# Altium PCB CablineDP.PcbDoc
Units mil, origin at the board's own origin, x right, y up, seen from the top; angles counter-clockwise.
Board outline 975 x 1750 mil, 2 copper layers (Top Layer, Bottom Layer); 11 components, 20 nets, 110 pads, 7 vias.
Unrouted connection lines stored in the file: 9.
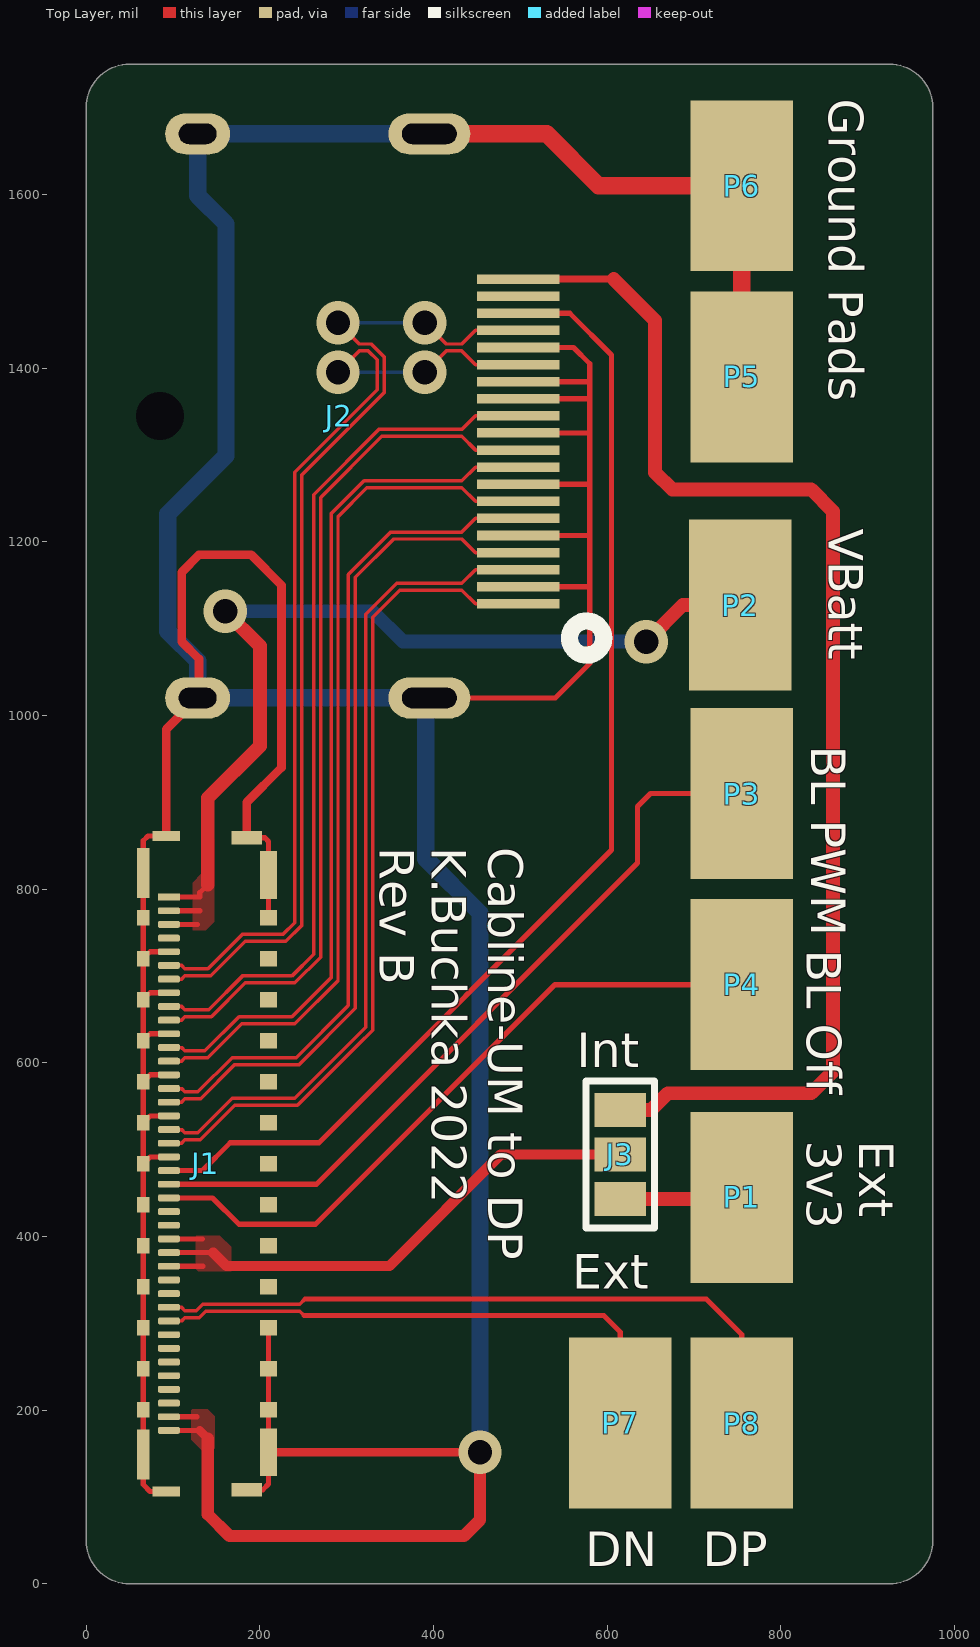
[diagram p0: Top Layer view]
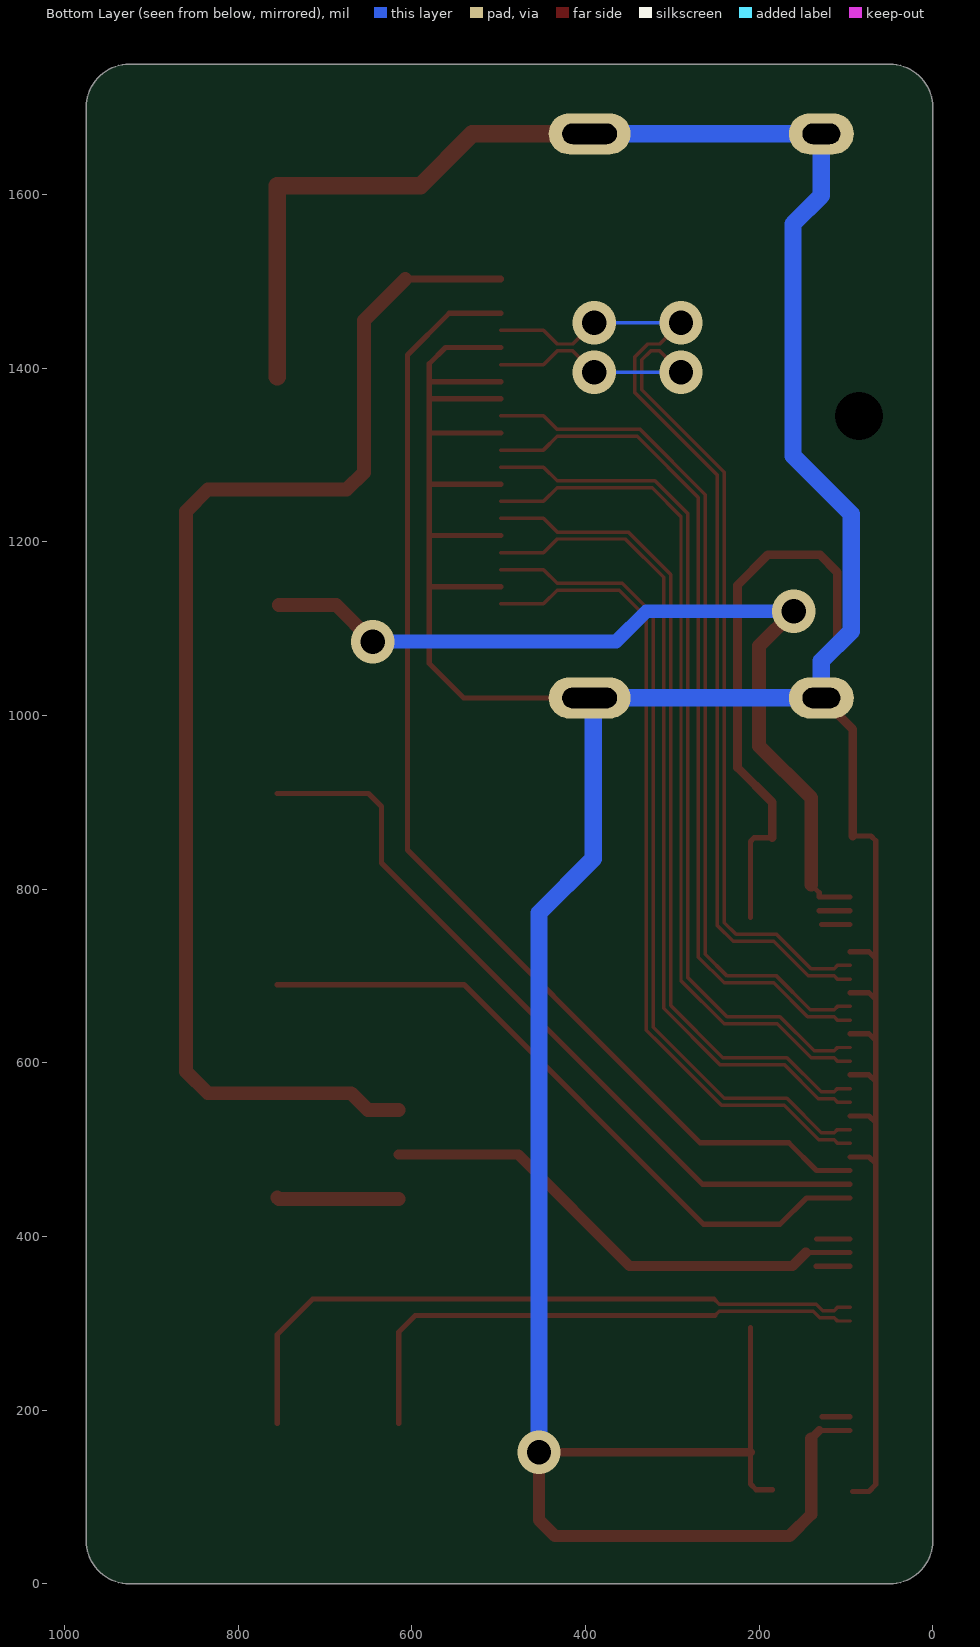
[diagram p1: Bottom Layer view, seen from below]

## Layer stack, top to bottom
Top Solder: solder mask 0.4, Solder Resist, Dk 3.5
Top Layer: signal copper 1.4
Dielectric 1: dielectric 12.6, FR-4, Dk 4.8
Bottom Layer: signal copper 1.4
Bottom Solder: solder mask 0.4, Solder Resist, Dk 3.5

## Board outline
0,50 0,1700 cw(c50,1700) 50,1750 925,1750 cw(c925,1700) 975,1700 975,50 cw(c925,50) 925,0 50,0 cw(c50,50)

## Design rules (kind name [scope] priority, off if disabled: settings)
Clearance [All] p1: gap=7 ignorepadtopadclearanceinfootprint=FALSE except(0: Arc-Hole Track-Hole SMDPad-Hole THPad-Hole Via-Hole Fill-Hole Poly-Hole Region-Hole Text-Hole; 4: Arc-Arc Arc-Track Track-Track)
DiffPairsRouting [All] p1: maxlimit=10 minlimit=4 mostfreqgap=4 toplayer_minwidth=4 toplayer_maxwidth=4 toplayer_prefwidth=4 bottomlayer_minwidth=4 bottomlayer_maxwidth=4 bottomlayer_prefwidth=4 maxuncoupledlength=500
PolygonConnect [All] p1: connectstyle=Relief reliefconductorwidth=10 reliefentries=4 polygonreliefangle="90 Angle" airgapwidth=10
RoomDefinition CablineDP [InComponentClass('CablineDP')] p1: confinementstyle=ConfineIn formatcopy=TRUE lockcomponents=FALSE outline -590,-55 6560,-55 6560,4825 -590,4825
RoutingVias [All] p1: holewidth=28 width=50 viastyle="Through Hole" minholewidth=28 minwidth=50 maxholewidth=28 maxwidth=50
SolderMaskExpansion [All] p1: expansion=4
Width [All] p1: maxlimit=20 minlimit=4 preferedwidth=10 minimp=50.000000 maximp=50.000000 favimp=50.000000
29 further rules are at their usual default settings.

## Classes and differential pairs
net class EDP_LINES: EDP_AUX_N EDP_AUX_P EDP_TX0_N EDP_TX0_P EDP_TX1_N EDP_TX1_P EDP_TX2_N EDP_TX2_P EDP_TX3_N EDP_TX3_P
component class CablineDP: J1 J3 P1 P2 P3 P4 P5 P6 P7 P8
differential pair EDP_TX3: +EDP_TX3_P -EDP_TX3_N
differential pair EDP_TX2: +EDP_TX2_P -EDP_TX2_N
differential pair EDP_TX1: +EDP_TX1_P -EDP_TX1_N
differential pair EDP_TX0: +EDP_TX0_P -EDP_TX0_N
differential pair EDP_AUX: +EDP_AUX_P -EDP_AUX_N

## Components (designator, comment, footprint, x,y, rotation, side; value= is the part's Value field where it differs from the comment)
J1 "I-PEX_20879-040E-01" I-PEX_20879-040E-01 95.24,483.78 r90 top
J2 "47272-0029" 47272-0029 497.6,1345 r270 top
J3 "Jumper SMD 3" "Jumper SMD 3" 615,520 r270 top
P1 "SMD 3x5" "SMD 3x5" 755,445 r270 top
P2 "SMD 3x5" "SMD 3x5" 753,1127 r270 top
P3 "SMD 3x5" "SMD 3x5" 755,910 r270 top
P4 "SMD 3x5" "SMD 3x5" 755,690 r270 top
P5 "SMD 3x5" "SMD 3x5" 755,1390 r270 top
P6 "SMD 3x5" "SMD 3x5" 755,1610 r270 top
P7 "SMD 3x5" "SMD 3x5" 615,185 r270 top
P8 "SMD 3x5" "SMD 3x5" 755,185 r270 top

## Footprints (in the part's own frame and the unit in brackets; to place one, negate y for a bottom-side part, rotate by r counter-clockwise, add the part's x,y. Pads: shape width x height; smd on the part's side, far side on the other; paste and mask are expansions set on the pad)
47272-0029 [mm] "Molex Displayport"
  rect 0.28x2.4 smd: 1(5.5,0) 2(5,0) 3(4.5,0) 4(4,0) 5(3.5,0) 6(3,0) 7(2.5,0) 8(2,0) 9(1.5,0) 10(1,0) 11(0.5,0) 12(0,0) 13(-0.5,0) 14(-1,0) 15(-1.5,0) 16(-2,0) 17(-2.5,0) 18(-3,0) 19(-3.5,0) 20(-4,0)
  oval 1.2x2.4 hole 0.6 slot 1.6 at 90 deg: 21(8.25,-2.6) 22(-8.25,-2.6)
  oval 1.2x1.9 hole 0.6 slot 1.1 at 90 deg: 23(8.25,-9.38) 24(-8.25,-9.38)
  round 0 hole 1.4 unplated: 25(0,-10.48)
  silkscreen extent 6,1.5 7,2.5
I-PEX_20879-040E-01 [mm] "40 pin micro-coax connector"
  rect 0.2x0.64 smd: 1(7.8,0)
  rrect50% 0.2x0.64 smd: 2(7.4,0) 3(7,0) 4(6.6,0) 5(6.2,0) 6(5.8,0) 7(5.4,0) 8(5,0) 9(4.6,0) 10(4.2,0) 11(3.8,0) 12(3.4,0) 13(3,0) 14(2.6,0) 15(2.2,0) 16(1.8,0) 17(1.4,0) 18(1,0) 19(0.6,0) 20(0.2,0) 21(-0.2,0) 22(-0.6,0) 23(-1,0) 24(-1.4,0) 25(-1.8,0) 26(-2.2,0) 27(-2.6,0) 28(-3,0) 29(-3.4,0) 30(-3.8,0) 31(-4.2,0) 32(-4.6,0) 33(-5,0) 34(-5.4,0) 35(-5.8,0) 36(-6.2,0) 37(-6.6,0) 38(-7,0) 39(-7.4,0) 40(-7.8,0)
  rect 1.4x0.51 smd: 41(-8.44,-2.915) 69(8.44,-2.915)
  rect 1.46x0.36 smd: 42(-8.505,0.75) 74(8.505,0.75)
  rect 0.45x0.36 smd: 43(-7.2,0.75) 44(-6,0.75) 45(-4.8,0.75) 46(-3.6,0.75) 47(-2.4,0.75) 48(-1.2,0.75) 49(0,0.75) 50(1.2,0.75) 51(2.4,0.75) 52(3.6,0.75) 53(4.8,0.75) 54(6,0.75) 55(7.2,0.75)
  rect 0.45x0.51 smd: 56(-7.2,-2.915) 57(-6,-2.915) 58(-4.8,-2.915) 59(-3.6,-2.915) 60(-2.4,-2.915) 61(-1.2,-2.915) 62(0,-2.915) 63(1.2,-2.915) 64(2.4,-2.915) 65(3.6,-2.915) 66(4.8,-2.915) 67(6,-2.915) 68(7.2,-2.915)
  rect 0.3x0.81 smd: 70(-9.585,0.075) 71(9.585,0.075)
  rect 0.4x0.9 smd: 72(-9.535,-2.28) 73(9.535,-2.28)
"Jumper SMD 3" [mm]
  rect 1x1.5 smd: 1(-0.65,0) 2(0.65,0) 3(1.95,0)
  silkscreen extent -1.5,-1 2.8,1
"SMD 3x5" [mm] "3x5mm SMD pad"
  rect 5x3 smd: 1(0,0)

## Part data
J2: "Molex displayport connector"

## Via types
v1: diameter 50, hole 28, Top Layer to Bottom Layer, 7 vias

## Nets (pads, with @x,y where several pads share a name; then routed paths per layer and width w, separated by ;. In a path a pad name is that pad's centre, name@x,y a point inside that pad or via, vN(x,y) a via of type N, cw(c..) or ccw(c..) an arc to the next point about the centre after c; other vN are vias at no path point)
3V3_EDP: J1.26 J1.27 J1.28 J3.2 | length 657.4
  Top Layer w6: J1.28 134.67,365.67 ; J1.27 146.42,381.42 ; J1.26 133.83,397.17
  Top Layer w12: 146.42,381.42 161.83,366 349,366 477.41,494.41 J3.2
BKOFF: J1.23 P4.1 | length 786.7
  Top Layer w6: J1.23 145.59,444.41 176,414 264,414 540,690 P4.1
BL_PWM_IN: J1.22 P3.1 | length 884.2
  Top Layer w6: J1.22 265.16,460.16 635,830 635,895 650,910 P3.1
DP_PWR: J2.20 J3.1 | length 1484.1
  Top Layer w8: J2.20 607.52,1502.48
  Top Layer w16: 607.52,1502.48 655,1455 655,1280 675,1260 835,1260 860,1235 860,590 835,565 670,565 650.59,545.59 J3.1
EDP_AUX_N: J1.7 J2.17 | length 1166.2
  Top Layer w4: J1.7 109.83,696.38 113.71,700.25 143.57,700.25 183.31,740 230,740 248,758 248,1276.69 343,1371.69 343,1413.05 328.31,1427.74 314.5,1427.74 v1(290,1452.24) ; v1(390,1452.24) 414.5,1427.74 432.67,1427.74 448.35,1443.43 J2.17
  Bottom Layer w4: v1(290,1452.24) v1(390,1452.24)
EDP_AUX_P: J1.6 J2.15 | length 1139.7
  Top Layer w4: J1.6 109.83,712.13 113.71,708.25 140.25,708.25 180,748 226.69,748 240,761.31 240,1280 335,1375 335,1409.74 325,1419.74 314.5,1419.74 v1(290,1395.24) ; v1(390,1395.24) 414.5,1419.74 432.67,1419.74 448.35,1404.06 J2.15
  Bottom Layer w4: v1(290,1395.24) v1(390,1395.24)
EDP_HPD: J1.21 J2.18 | length 1360
  Top Layer w6: J1.21 133.91,475.91 166,508 268,508 605,845 605,1415 556.89,1463.11 J2.18
EDP_TX0_N: J1.10 J2.10 | length 997.4
  Top Layer w4: J1.10 109.83,649.13 113.71,653.01 144.32,653.01 183.31,692 240.31,692 270,721.69 270,1251 340.32,1321.32 432.67,1321.32 448.35,1305.63 J2.10
EDP_TX0_P: J1.9 J2.12 | length 997.4
  Top Layer w4: J1.9 109.83,664.88 113.71,661.01 141.01,661.01 180,700 237,700 262,725 262,1254.31 337,1329.32 432.67,1329.32 448.35,1345 J2.12
EDP_TX1_N: J1.13 J2.7 | length 995.4
  Top Layer w4: J1.13 109.83,601.89 113.71,605.76 140.08,605.76 179.31,645 240.31,645 290,694.69 290,1229 323.26,1262.26 432.67,1262.26 448.35,1246.57 J2.7
EDP_TX1_P: J1.12 J2.9 | length 995.4
  Top Layer w4: J1.12 109.83,617.64 113.71,613.76 136.76,613.76 176,653 237,653 282,698 282,1232.31 319.95,1270.26 432.67,1270.26 448.35,1285.94 J2.9
EDP_TX2_N: J1.16 J2.4 | length 968.2
  Top Layer w4: J1.16 109.83,554.65 113.71,558.52 131.83,558.52 171.31,598 245.31,598 310,662.69 310,1159 354.2,1203.2 432.67,1203.2 448.35,1187.52 J2.4
EDP_TX2_P: J1.15 J2.6 | length 968.2
  Top Layer w4: J1.15 109.83,570.39 113.71,566.52 128.52,566.52 168,606 242,606 302,666 302,1162.31 350.89,1211.2 432.67,1211.2 448.35,1226.89 J2.6
EDP_TX3_N: J1.19 J2.1 | length 951
  Top Layer w4: J1.19 109.83,507.4 113.71,511.28 131.59,511.28 171.31,551 243.31,551 313.66,621.34 330,637.69 330,1113 361.15,1144.15 432.67,1144.15 448.35,1128.46 J2.1
EDP_TX3_P: J1.18 J2.3 | length 951
  Top Layer w4: J1.18 109.83,523.15 113.71,519.28 128.28,519.28 168,559 240,559 322,641 322,1116.31 357.84,1152.15 432.67,1152.15 448.35,1167.83 J2.3
GND: J1.5 J1.8 J1.11 J1.14 J1.17 J1.20 J1.39 J1.40 J1.41 J1.42 J1.43 J1.44 J1.45 J1.46 J1.47 J1.48 J1.49 J1.50 J1.51 J1.52 J1.53 J1.54 J1.55 J1.56 J1.57 J1.58 J1.59 J1.60 J1.61 J1.62 J1.63 J1.64 J1.65 J1.66 J1.67 J1.68 J1.69 J1.70 J1.71 J1.72 J1.73 J1.74 J2.2 J2.5 J2.8 J2.11 J2.13 J2.14 J2.16 J2.21 J2.22 J2.23 J2.24 P5.1 P6.1 | length 6784.8
  Top Layer w6: J1.70 73.58,106.42 65.71,114.29 J1.42 J1.43 J1.44 J1.45 J1.46 J1.47 J1.48 J1.49 ; J1.71 71.14,861.14 65.71,855.71 J1.74 J1.55 J1.54 ; J1.40 130.69,176.69 ; J1.39 127.56,192.44 ; J1.20 73.58,491.65 J1.49 ; J1.17 73.58,538.9 J1.50 ; J1.14 73.58,586.14 J1.51 ; J1.11 73.58,633.39 J1.52 ; J1.8 73.58,680.63 J1.53 ; J1.5 73.58,727.87 J1.54 ; J1.72 203.39,108.39 210,115 J1.41 J1.56 J1.57 J1.58 ; J1.73 205.83,859.17 210,855 J1.69 J1.68 ; J2.21 540.2,1020.2 580,1060 580,1148.15 ; J2.2 580,1148.15 ; J2.5 580,1207.2 ; J2.8 578.74,1266.26 580,1265 ; J2.11 579.68,1325.32 580,1325 ; J2.13 579.68,1364.68 580,1365 ; J2.14 579.37,1384.37 580,1385 ; J2.16 561.26,1423.74 580,1405 580,1385 ; J1.49 J1.50 ; J1.50 J1.51 ; J1.51 J1.52 ; J1.52 J1.53 ; J1.53 J1.54 ; 580,1148.15 580,1207.2 ; 580,1207.2 580,1265 ; 580,1265 580,1325 ; 580,1325 580,1365 ; 580,1365 580,1385
  Top Layer w10: J1.71 92.28,984.17 J2.23 130,1021.89 130,1065 110,1085 110,1165 130,1185 190,1185 225,1150 225,940 185,900 J1.73 ; 130.69,176.69 140,167.39 ; J1.41 v1(453.5,151.5)
  Top Layer w14: 140,167.39 140,80 165,55 435,55 453.5,73.5 v1(453.5,151.5)
  Top Layer w20: J2.22 530.2,1669.8 590,1610 P6.1 P5.1
  Bottom Layer w20: J2.22 J2.24 128.31,1598.69 161,1566 161,1299 94,1232 94,1097 128.31,1062.69 J2.23 J2.21 391,1015.96 391,835 453.5,772.5 v1(453.5,151.5)
NetJ3_3: J3.3 P1.1 | length 140.7
  Top Layer w16: J3.3 753.23,443.23 P1.1
USB_DN: J1.32 P7.1 | length 639.4
  Top Layer w4: J1.32 109.83,302.68 113.71,306.55 130.31,306.55 137.76,314 246,314 251,309
  Top Layer w6: 251,309 596,309 615,290 P7.1
USB_DP: J1.31 P8.1 | length 785.9
  Top Layer w4: J1.31 109.83,318.43 113.71,314.55 127,314.55 134.45,322 246,322 252,328
  Top Layer w6: 252,328 714,328 755,287 P8.1
VBATT: J1.1 J1.2 J1.3 P2.1 | length 1103.6
  Top Layer w6: J1.3 128.37,759.37 ; J1.2 130.88,775.12 ; J1.1 130.87,790.87 130.87,795.87 140,805
  Top Layer w16: 140,805 140,905 200,965 200,1080 v1(160,1120) ; v1(645,1085) 687,1127 P2.1
  Bottom Layer w16: v1(160,1120) 330,1120 365,1085 v1(645,1085)
pads on no net: J1.4 J1.24 J1.25 J1.29 J1.30 J1.33 J1.34 J1.35 J1.36 J1.37 J1.38 J2.19 J2.25

## Polygon pours and split planes (outlines as drawn)
GND on Top Layer (solid, pour order 4): 121,166 133,154 146,154 148,156 148,193 140,201 122,201 121,200
3V3_EDP on Top Layer (solid, pour order 2): 167,360 167,388 154,401 127,401 126,400 126,363 129,360
VBATT on Top Layer "Top Side-VBATT" (solid, pour order 0): 132.47,857.53 147.47,857.53 147.47,762.53 137.47,752.53 122.47,752.53 122.47,807.53 132.47,817.53

## Silkscreen, mask and mechanical layers (free items; w line width, h text height)
Top Overlay:
  text "Ground Pads" at 855,1710 h40 r270
  text "VBatt" at 855,1215 h40 r270
  text "BL PWM" at 835,965 h40 r270
  text "Rev B" at 338,848 h40 r270
  text "K.Buchka 2022" at 398,848 h40 r270
  text "Cabline-UM to DP" at 463,848 h40 r270
  text "BL Off" at 830,730 h40 r270
  text "Int" at 565,595 h40
  text "Ext / 3v3" at 830,510 h40 r270
  text "Ext" at 560,340 h40
  text "DN" at 575,20 h40
  text "DP" at 710,20 h40
Mechanical 13:
  the board outline again, w3.94

## Text inside footprints (layer, text, board x,y; h text height)
J1: Mechanical 1 "Cable exit" at 303.9,290.87 h39.37 r90